# Allegro board newBoardCircle_squarechug_viadone.brd
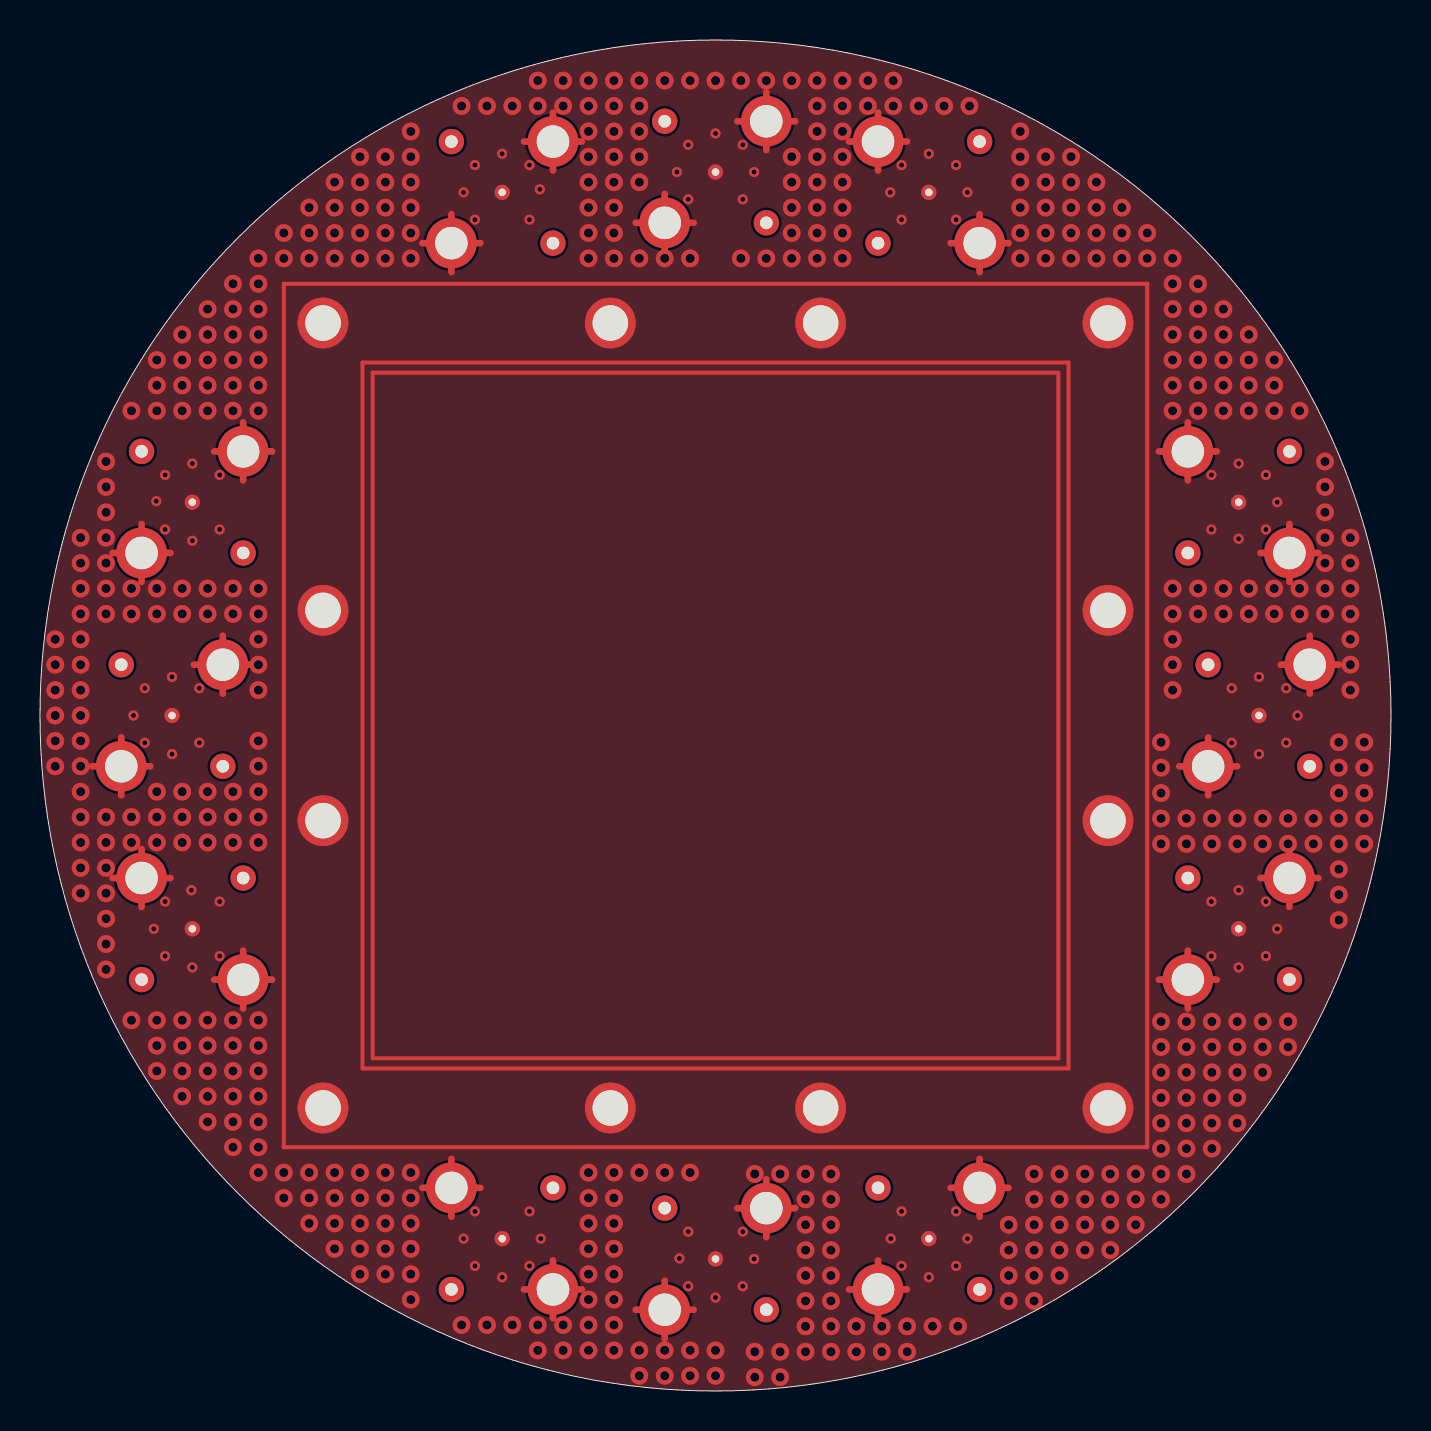
[diagram p0: board, top side]
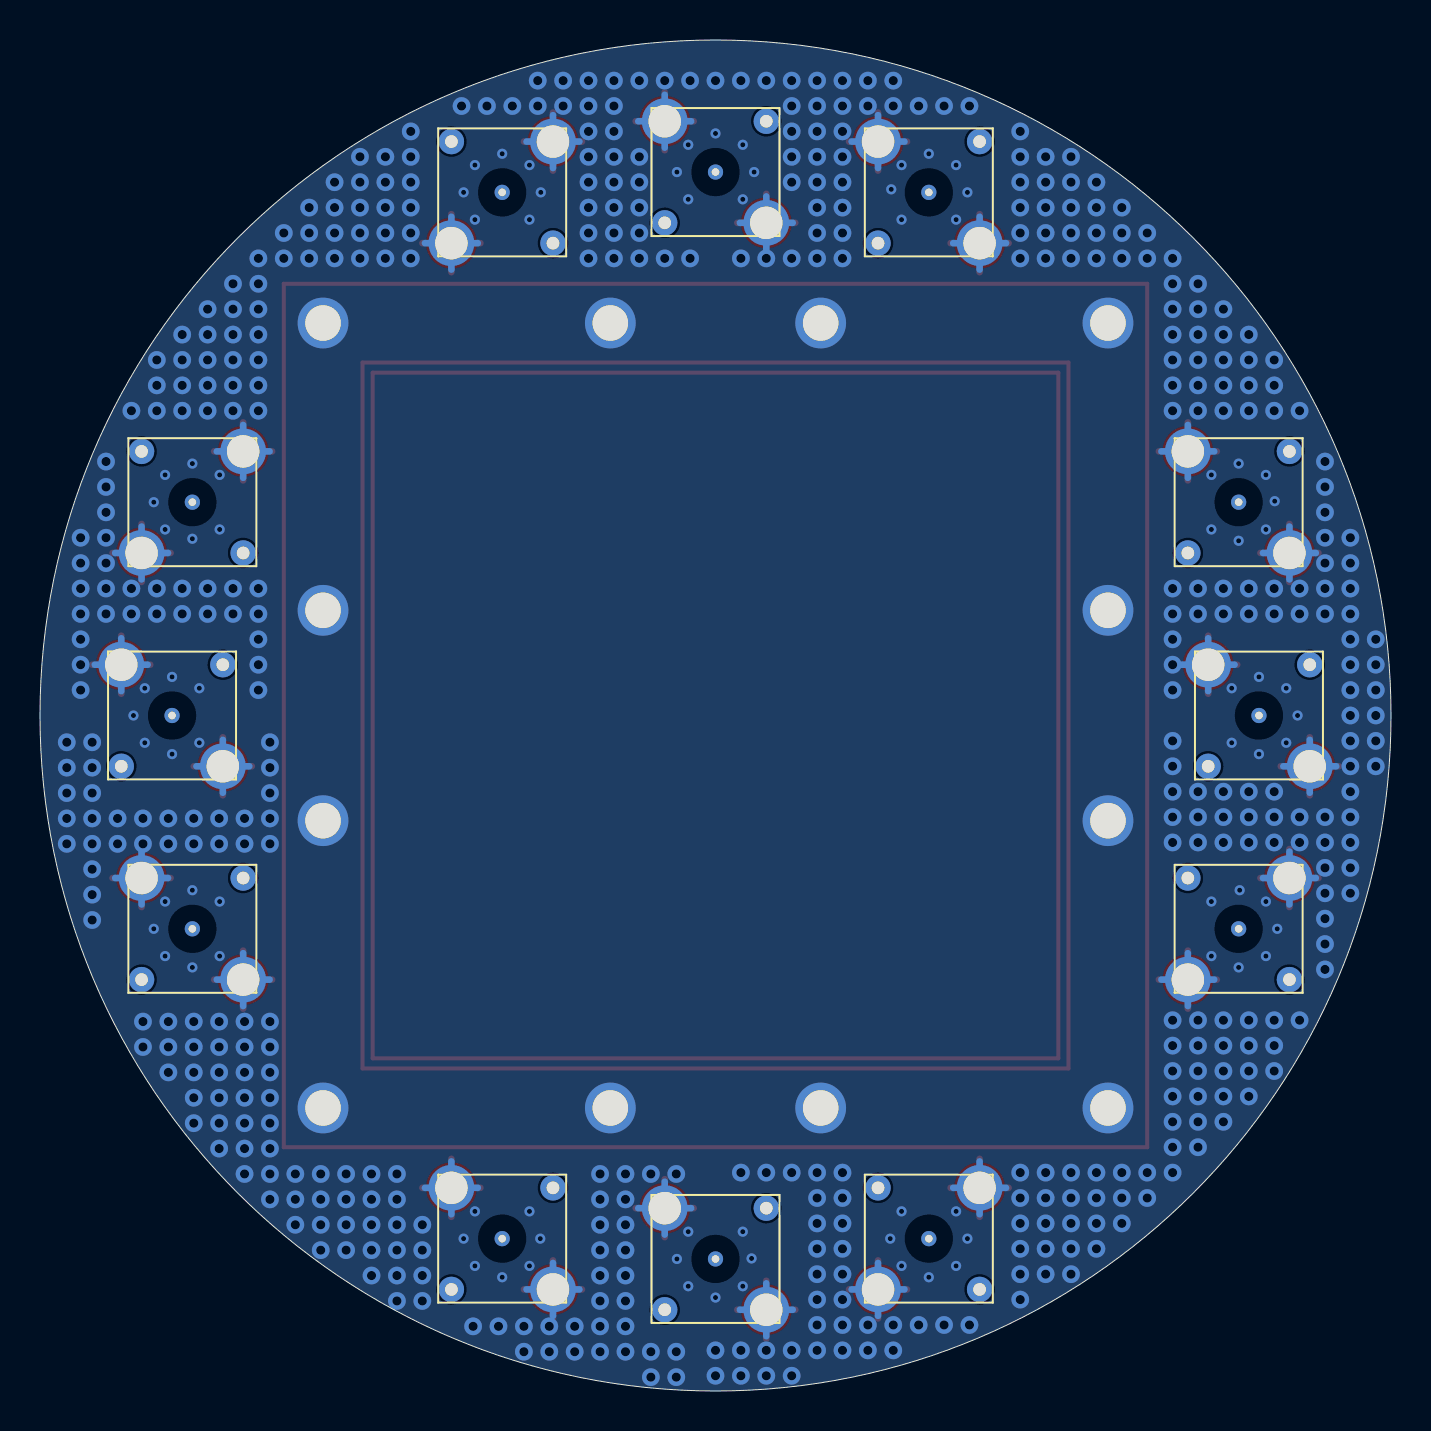
[diagram p1: board, bottom side, seen from below]

Outline 67.56 x 67.56 mm; copper layers: TOP, 02_GND, 03_SIG, BOTTOM. Coordinates in mm from the lower left corner of the outline.
Outline path: circle c33.78,33.78 r33.78

## Placement (name value [footprint] x y rotation side)
J1  -  [SSMA_BB]  60.96 33.78 180 bottom
J2  -  [SSMA_BB]  59.94 44.45 270 bottom
J3  -  [SSMA_BB]  44.45 59.94 270 bottom
J4  -  [SSMA_BB]  33.78 60.96 180 bottom
J5  -  [SSMA_BB]  23.11 59.94 180 bottom
J6  -  [SSMA_BB]  7.62 44.45 180 bottom
J7  -  [SSMA_BB]  6.6 33.78 180 bottom
J8  -  [SSMA_BB]  7.62 23.11 270 bottom
J9  -  [SSMA_BB]  23.11 7.62 270 bottom
J10  -  [SSMA_BB]  33.78 6.6 180 bottom
J11  -  [SSMA_BB]  44.45 7.62 180 bottom
J12  -  [SSMA_BB]  59.94 23.11 180 bottom
MTG1  -  [HOLE070P]  53.41 39.04 0 top
MTG2  -  [HOLE070P]  39.04 53.41 0 top
MTG3  -  [HOLE070P]  28.52 53.41 0 top
MTG4  -  [HOLE070P]  14.15 39.04 0 top
MTG5  -  [HOLE070P]  14.15 28.52 0 top
MTG6  -  [HOLE070P]  28.52 14.15 0 top
MTG7  -  [HOLE070P]  39.04 14.15 0 top
MTG8  -  [HOLE070P]  53.41 28.52 0 top
MTG9  -  [HOLE070P]  53.41 53.41 0 top
MTG10  -  [HOLE070P]  53.41 14.15 0 top
MTG11  -  [HOLE070P]  14.15 14.15 0 top
MTG12  -  [HOLE070P]  14.15 53.41 0 top

## Library data of the parts
J1-J12 = SSMA_BB
MTG1-MTG12 = HOLE070P

## Footprints (pads in the part's own frame, mm; a bottom-side part is the same pattern mirrored in y, then rotated)
HOLE070P
  round 2.54 hole 1.778: 1(0,0)
SSMA_BB
  round 1.27 hole 0.635: (-2.54,-2.54) (2.54,2.54)
  round 0.762 hole 0.381: 1(0,0)
  round 2.54 hole 1.626: 2(-2.54,2.54) 3(2.54,-2.54)

## Nets
GND: J1.2(TP-2) J1.3(TP-3) J2.2(TP-2) J2.3(TP-3) J3.2(TP-2) J3.3(TP-3) J4.2(TP-2) J4.3(TP-3) J5.2(TP-2) J5.3(TP-3) J6.2(TP-2) J6.3(TP-3) J7.2(TP-2) J7.3(TP-3) J8.2(TP-2) J8.3(TP-3) J9.2(TP-2) J9.3(TP-3) J10.2(TP-2) J10.3(TP-3) J11.2(TP-2) J11.3(TP-3) J12.2(TP-2) J12.3(TP-3) MTG1.1(TP-1) MTG2.1(TP-1) MTG3.1(TP-1) MTG4.1(TP-1) MTG5.1(TP-1) MTG6.1(TP-1) MTG7.1(TP-1) MTG8.1(TP-1) MTG9.1(TP-1) MTG10.1(TP-1) MTG11.1(TP-1) MTG12.1(TP-1)
MICROWAVE: J1.1(TP-1) J2.1(TP-1) J3.1(TP-1) J4.1(TP-1) J5.1(TP-1) J6.1(TP-1) J7.1(TP-1) J8.1(TP-1) J9.1(TP-1) J10.1(TP-1) J11.1(TP-1) J12.1(TP-1)

## Via types
v1: diameter 0.889, hole 0.457, TOP to BOTTOM, 469 vias
v2: diameter 0.508, hole 0.254, TOP to BOTTOM, 84 vias

## Routing (per net, layer and track width the routed paths; a pad name or vN(x,y) marks a point on that pad's centre or on a via; arc(x,y) is an arc through that point)
GND: length 392.7
  TOP w0.33: J6.2 11.61,46.99 ; J6.2 8.71,46.99 ; J6.2 10.16,45.54 ; J6.2 10.16,48.44 ; J5.3 22.02,57.4 ; J5.3 20.57,55.96 ; J5.3 20.57,58.85 ; J5.3 19.13,57.4 ; 36.32,62.05 J4.2 ; J4.2 34.87,63.5 ; J4.2 36.32,64.95 ; J4.2 37.77,63.5 ; J2.2 57.4,48.44 ; J2.2 55.96,46.99 ; J2.2 58.85,46.99 ; J2.2 57.4,45.54 ; 24.21,5.08 J9.3 ; J9.3 25.65,6.53 ; J9.3 27.1,5.08 ; J9.3 25.65,3.63 ; J3.3 46.99,58.85 ; J3.3 48.44,57.4 ; J3.3 45.54,57.4 ; J3.3 46.99,55.96 ; 46.99,8.71 J11.2 ; J11.2 45.54,10.16 ; J11.2 48.44,10.16 ; J11.2 46.99,11.61 ; 40.46,62.48 J3.2 ; J3.2 41.91,61.04 ; J3.2 41.91,63.93 ; J3.2 43.36,62.48 ; 34.87,9.14 J10.2 ; J10.2 36.32,10.59 ; J10.2 37.77,9.14 ; J10.2 36.32,7.7 ; J10.3 31.24,5.51 ; J10.3 29.79,4.06 ; J10.3 32.69,4.06 ; J10.3 31.24,2.62 ; J12.3 58.85,20.57 ; J12.3 55.96,20.57 ; J12.3 57.4,19.13 ; J12.3 57.4,22.02 ; 4.06,29.79 J7.3 ; J7.3 4.06,32.69 ; J7.3 2.62,31.24 ; J7.3 5.51,31.24 ; 58.42,29.79 J1.3 ; J1.3 56.97,31.24 ; J1.3 59.87,31.24 ; J1.3 58.42,32.69 ; 10.16,19.13 J8.3 ; J8.3 10.16,22.02 ; J8.3 8.71,20.57 ; J8.3 11.61,20.57 ; 62.48,24.21 J12.2 ; J12.2 62.48,27.1 ; J12.2 61.04,25.65 ; J12.2 63.93,25.65 ; 9.14,34.87 J7.2 ; J7.2 10.59,36.32 ; J7.2 7.7,36.32 ; J7.2 9.14,37.77 ; J1.2 63.5,37.77 ; J1.2 62.05,36.32 ; J1.2 63.5,34.87 ; J1.2 64.95,36.32 ; 25.65,61.04 J5.2 ; J5.2 27.1,62.48 ; J5.2 25.65,63.93 ; J5.2 24.21,62.48 ; 3.63,25.65 J8.2 ; J8.2 5.08,24.21 ; J8.2 5.08,27.1 ; J8.2 6.53,25.65 ; J4.3 31.24,59.87 ; J4.3 29.79,58.42 ; J4.3 32.69,58.42 ; J4.3 31.24,56.97 ; J2.3 63.93,41.91 ; J2.3 62.48,40.46 ; J2.3 62.48,43.36 ; J2.3 61.04,41.91 ; 20.57,8.71 J9.2 ; J9.2 20.57,11.61 ; J9.2 22.02,10.16 ; J9.2 19.13,10.16 ; J6.3 5.08,43.36 ; J6.3 3.63,41.91 ; J6.3 6.53,41.91 ; J6.3 5.08,40.46 ; 40.46,5.08 J11.3 ; J11.3 41.91,3.63 ; J11.3 43.36,5.08 ; J11.3 41.91,6.53
  03_SIG w0.33: 3.76,41.91 J6.3 ; J6.3 6.4,41.91 ; J6.3 5.08,40.59 ; J6.3 5.08,43.23 ; J3.2 43.23,62.48 ; J3.2 40.59,62.48 ; J3.2 41.91,61.16 ; J3.2 41.91,63.81 ; J8.3 10.16,21.9 ; J8.3 10.16,19.25 ; J8.3 11.48,20.57 ; J8.3 8.84,20.57 ; J9.3 26.98,5.08 ; J9.3 25.65,3.76 ; J9.3 25.65,6.4 ; J9.3 24.33,5.08 ; J7.3 5.39,31.24 ; J7.3 4.06,32.56 ; J7.3 2.74,31.24 ; J7.3 4.06,29.92 ; J6.2 11.48,46.99 ; J6.2 10.16,48.31 ; J6.2 8.84,46.99 ; J6.2 10.16,45.67 ; 9.14,35 J7.2 ; J7.2 9.14,37.64 ; J7.2 10.47,36.32 ; J7.2 7.82,36.32 ; J12.3 58.73,20.57 ; J12.3 56.08,20.57 ; J12.3 57.4,19.25 ; J12.3 57.4,21.9 ; 25.65,61.16 J5.2 ; J5.2 24.33,62.48 ; J5.2 26.98,62.48 ; J5.2 25.65,63.81 ; 62.48,40.59 J2.3 ; J2.3 63.81,41.91 ; J2.3 62.48,43.23 ; J2.3 61.16,41.91 ; J1.3 59.74,31.24 ; J1.3 58.42,32.56 ; J1.3 57.1,31.24 ; J1.3 58.42,29.92 ; 46.99,8.84 J11.2 ; J11.2 48.31,10.16 ; J11.2 46.99,11.48 ; J11.2 45.67,10.16 ; J12.2 62.48,26.98 ; J12.2 62.48,24.33 ; J12.2 61.16,25.65 ; J12.2 63.81,25.65 ; J10.2 36.32,10.47 ; J10.2 35,9.14 ; J10.2 37.64,9.14 ; J10.2 36.32,7.82 ; J5.3 21.9,57.4 ; J5.3 19.25,57.4 ; J5.3 20.57,56.08 ; J5.3 20.57,58.73 ; 29.92,58.42 J4.3 ; J4.3 32.56,58.42 ; J4.3 31.24,59.74 ; J4.3 31.24,57.1 ; 29.92,4.06 J10.3 ; J10.3 31.24,5.39 ; J10.3 31.24,2.74 ; J10.3 32.56,4.06 ; 41.91,3.76 J11.3 ; J11.3 41.91,6.4 ; J11.3 40.59,5.08 ; J11.3 43.23,5.08 ; J9.2 20.57,11.48 ; J9.2 19.25,10.16 ; J9.2 21.9,10.16 ; J9.2 20.57,8.84 ; J3.3 46.99,58.73 ; J3.3 45.67,57.4 ; J3.3 48.31,57.4 ; J3.3 46.99,56.08 ; J2.2 57.4,48.31 ; J2.2 58.73,46.99 ; J2.2 57.4,45.67 ; J2.2 56.08,46.99 ; J4.2 36.32,64.82 ; J4.2 37.64,63.5 ; J4.2 36.32,62.18 ; J4.2 35,63.5 ; J8.2 5.08,26.98 ; J8.2 5.08,24.33 ; J8.2 6.4,25.65 ; J8.2 3.76,25.65 ; J1.2 64.82,36.32 ; J1.2 63.5,35 ; J1.2 62.18,36.32 ; J1.2 63.5,37.64
  BOTTOM w0.33: J5.3 21.9,57.4 ; J5.3 20.57,58.73 ; J5.3 19.25,57.4 ; J5.3 20.57,56.08 ; J7.3 4.06,32.56 ; J7.3 5.39,31.24 ; J7.3 2.74,31.24 ; J7.3 4.06,29.92 ; 19.25,10.16 J9.2 ; J9.2 20.57,11.48 ; J9.2 21.9,10.16 ; J9.2 20.57,8.84 ; 56.08,46.99 J2.2 ; J2.2 58.73,46.99 ; J2.2 57.4,45.67 ; J2.2 57.4,48.31 ; 3.76,25.65 J8.2 ; J8.2 5.08,24.33 ; J8.2 5.08,26.98 ; J8.2 6.4,25.65 ; 31.24,57.1 J4.3 ; J4.3 29.92,58.42 ; J4.3 32.56,58.42 ; J4.3 31.24,59.74 ; 35,9.14 J10.2 ; J10.2 36.32,7.82 ; J10.2 37.64,9.14 ; J10.2 36.32,10.47 ; 40.59,5.08 J11.3 ; J11.3 41.91,6.4 ; J11.3 43.23,5.08 ; J11.3 41.91,3.76 ; J3.2 41.91,63.81 ; J3.2 41.91,61.16 ; J3.2 43.23,62.48 ; J3.2 40.59,62.48 ; 62.18,36.32 J1.2 ; J1.2 64.82,36.32 ; J1.2 63.5,35 ; J1.2 63.5,37.64 ; 61.16,25.65 J12.2 ; J12.2 62.48,24.33 ; J12.2 62.48,26.98 ; J12.2 63.81,25.65 ; 25.65,61.16 J5.2 ; J5.2 25.65,63.81 ; J5.2 24.33,62.48 ; J5.2 26.98,62.48 ; 5.08,40.59 J6.3 ; J6.3 5.08,43.23 ; J6.3 3.76,41.91 ; J6.3 6.4,41.91 ; 24.33,5.08 J9.3 ; J9.3 25.65,6.4 ; J9.3 25.65,3.76 ; J9.3 26.98,5.08 ; J4.2 37.64,63.5 ; J4.2 35,63.5 ; J4.2 36.32,62.18 ; J4.2 36.32,64.82 ; 31.24,2.74 J10.3 ; J10.3 32.56,4.06 ; J10.3 29.92,4.06 ; J10.3 31.24,5.39 ; J11.2 46.99,11.48 ; J11.2 48.31,10.16 ; J11.2 45.67,10.16 ; J11.2 46.99,8.84 ; 57.4,19.25 J12.3 ; J12.3 56.08,20.57 ; J12.3 57.4,21.9 ; J12.3 58.73,20.57 ; J1.3 58.42,32.56 ; J1.3 57.1,31.24 ; J1.3 59.74,31.24 ; J1.3 58.42,29.92 ; 10.16,19.25 J8.3 ; J8.3 8.84,20.57 ; J8.3 11.48,20.57 ; J8.3 10.16,21.9 ; J6.2 10.16,48.31 ; J6.2 8.84,46.99 ; J6.2 11.48,46.99 ; J6.2 10.16,45.67 ; J2.3 62.48,43.23 ; J2.3 62.48,40.59 ; J2.3 61.16,41.91 ; J2.3 63.81,41.91 ; J7.2 10.47,36.32 ; J7.2 7.82,36.32 ; J7.2 9.14,35 ; J7.2 9.14,37.64 ; J3.3 48.31,57.4 ; J3.3 46.99,56.08 ; J3.3 46.99,58.73 ; J3.3 45.67,57.4
  vias: v1(0.76,37.59) v1(0.76,36.32) v1(0.76,35.05) v1(0.76,33.78) v1(0.76,32.51) v1(0.76,31.24) v1(2.03,42.67) v1(2.03,41.4) v1(2.03,40.13) v1(2.03,38.86) v1(2.03,37.59) v1(2.03,36.32) v1(2.03,35.05) v1(2.03,33.78) v1(2.03,32.51) v1(2.03,31.24) v1(2.03,29.97) v1(2.03,28.7) v1(2.03,27.43) v1(2.03,26.16) v1(2.03,24.89) v1(3.3,46.48) v1(3.3,45.21) v1(3.3,43.94) v1(3.3,42.67) v1(3.3,41.4) v1(3.3,40.13) v1(3.3,38.86) v1(3.3,28.7) v1(3.3,27.43) v1(3.3,26.16) v1(3.3,24.89) v1(3.3,23.62) v1(3.3,22.35) v1(3.3,21.08) v1(4.57,49.02) v1(4.57,40.13) v1(4.57,38.86) v1(4.57,28.7) v1(4.57,27.43) v1(4.57,18.54) v1(5.84,51.56) v1(5.84,50.29) v1(5.84,49.02) v1(5.84,40.13) v1(5.84,38.86) v1(5.84,29.97) v1(5.84,28.7) v1(5.84,27.43) v1(5.84,18.54) v1(5.84,17.27) v1(5.84,16) v1(7.11,52.83) v1(7.11,51.56) v1(7.11,50.29) v1(7.11,49.02) v1(7.11,40.13) v1(7.11,38.86) v1(7.11,29.97) v1(7.11,28.7) v1(7.11,27.43) v1(7.11,18.54) v1(7.11,17.27) v1(7.11,16) v1(7.11,14.73) v1(8.38,54.1) v1(8.38,52.83) v1(8.38,51.56) v1(8.38,50.29) v1(8.38,49.02) v1(8.38,40.13) v1(8.38,38.86) v1(8.38,29.97) v1(8.38,28.7) v1(8.38,27.43) v1(8.38,18.54) v1(8.38,17.27) v1(8.38,16) v1(8.38,14.73) v1(8.38,13.46) v1(9.65,55.37) v1(9.65,54.1) v1(9.65,52.83) v1(9.65,51.56) v1(9.65,50.29) v1(9.65,49.02) v1(9.65,40.13) v1(9.65,38.86) v1(9.65,29.97) v1(9.65,28.7) v1(9.65,27.43) v1(9.65,18.54) v1(9.65,17.27) v1(9.65,16) v1(9.65,14.73) v1(9.65,13.46) v1(9.65,12.19) v1(10.92,56.64) v1(10.92,55.37) v1(10.92,54.1) v1(10.92,52.83) v1(10.92,51.56) v1(10.92,50.29) v1(10.92,49.02) v1(10.92,40.13) v1(10.92,38.86) v1(10.92,37.59) v1(10.92,36.32) v1(10.92,35.05) v1(10.92,32.51) v1(10.92,31.24) v1(10.92,29.97) v1(10.92,28.7) v1(10.92,27.43) v1(10.92,18.54) v1(10.92,17.27) v1(10.92,16) v1(10.92,14.73) v1(10.92,13.46) v1(10.92,12.19) v1(10.92,10.92) v1(12.19,57.91) v1(12.19,56.64) v1(12.19,10.92) v1(12.19,9.65) v1(13.46,59.18) v1(13.46,57.91) v1(13.46,56.64) v1(13.46,10.92) v1(13.46,9.65) v1(13.46,8.38) v1(14.73,60.45) v1(14.73,59.18) v1(14.73,57.91) v1(14.73,56.64) v1(14.73,10.92) v1(14.73,9.65) v1(14.73,8.38) v1(14.73,7.11) v1(16,61.72) v1(16,60.45) v1(16,59.18) v1(16,57.91) v1(16,56.64) v1(16,10.92) v1(16,9.65) v1(16,8.38) v1(16,7.11) v1(16,5.84) v1(17.27,61.72) v1(17.27,60.45) v1(17.27,59.18) v1(17.27,57.91) v1(17.27,56.64) v1(17.27,10.92) v1(17.27,9.65) v1(17.27,8.38) v1(17.27,7.11) v1(17.27,5.84) v1(18.54,62.99) v1(18.54,61.72) v1(18.54,60.45) v1(18.54,59.18) v1(18.54,57.91) v1(18.54,56.64) v1(18.54,10.92) v1(18.54,9.65) v1(18.54,8.38) v1(18.54,7.11) v1(18.54,5.84) v1(18.54,4.57) v1(21.08,64.26) v1(21.08,3.3) v1(22.35,64.26) v1(22.35,3.3) v1(23.62,64.26) v1(23.62,3.3) v1(24.89,65.53) v1(24.89,64.26) v1(24.89,3.3) v1(24.89,2.03) v1(26.16,65.53) v1(26.16,64.26) v1(26.16,3.3) v1(26.16,2.03) v1(27.43,65.53) v1(27.43,64.26) v1(27.43,62.99) v1(27.43,61.72) v1(27.43,60.45) v1(27.43,59.18) v1(27.43,57.91) v1(27.43,56.64) v1(27.43,10.92) v1(27.43,9.65) v1(27.43,8.38) v1(27.43,7.11) v1(27.43,5.84) v1(27.43,4.57) v1(27.43,3.3) v1(27.43,2.03) v1(28.7,65.53) v1(28.7,64.26) v1(28.7,62.99) v1(28.7,61.72) v1(28.7,60.45) v1(28.7,59.18) v1(28.7,57.91) v1(28.7,56.64) v1(28.7,10.92) v1(28.7,9.65) v1(28.7,8.38) v1(28.7,7.11) v1(28.7,5.84) v1(28.7,4.57) v1(28.7,3.3) v1(28.7,2.03) v1(29.97,65.53) v1(29.97,64.26) v1(29.97,62.99) v1(29.97,61.72) v1(29.97,60.45) v1(29.97,56.64) v1(29.97,10.92) v1(29.97,2.03) v1(29.97,0.76) v1(31.24,65.53) v1(31.24,56.64) v1(31.24,10.92) v1(31.24,2.03) v1(31.24,0.76) v1(32.51,65.53) v1(32.51,56.64) v1(32.51,10.92) v1(32.51,2.03) v1(32.51,0.76) v1(33.78,65.53) v1(33.78,2.03) v1(33.78,0.76) v1(35.05,65.53) v1(35.05,56.64) v1(35.74,10.85) v1(35.74,1.96) v1(35.74,0.69) v1(36.32,65.53) v1(36.32,56.64) v1(37.01,10.85) v1(37.01,1.96) v1(37.01,0.69) v1(37.59,65.53) v1(37.59,61.72) v1(37.59,60.45) v1(37.59,59.18) v1(37.59,57.91) v1(37.59,56.64) v1(38.28,10.85) v1(38.28,9.58) v1(38.28,8.31) v1(38.28,7.04) v1(38.28,5.77) v1(38.28,4.5) v1(38.28,3.23) v1(38.28,1.96) v1(38.86,65.53) v1(38.86,64.26) v1(38.86,62.99) v1(38.86,61.72) v1(38.86,60.45) v1(38.86,59.18) v1(38.86,57.91) v1(38.86,56.64) v1(39.55,10.85) v1(39.55,9.58) v1(39.55,8.31) v1(39.55,7.04) v1(39.55,5.77) v1(39.55,4.5) v1(39.55,3.23) v1(39.55,1.96) v1(40.13,65.53) v1(40.13,64.26) v1(40.13,62.99) v1(40.13,61.72) v1(40.13,60.45) v1(40.13,59.18) v1(40.13,57.91) v1(40.13,56.64) v1(40.82,3.23) v1(40.82,1.96) v1(41.4,65.53) v1(41.4,64.26) v1(42.09,3.23) v1(42.09,1.96) v1(42.67,65.53) v1(42.67,64.26) v1(43.36,3.23) v1(43.36,1.96) v1(43.94,64.26) v1(44.63,3.23) v1(45.21,64.26) v1(45.9,3.23) v1(46.48,64.26) v1(48.44,8.31) v1(48.44,7.04) v1(48.44,5.77) v1(48.44,4.5) v1(49.02,62.99) v1(49.02,61.72) v1(49.02,60.45) v1(49.02,59.18) v1(49.02,57.91) v1(49.02,56.64) v1(49.71,10.85) v1(49.71,9.58) v1(49.71,8.31) v1(49.71,7.04) v1(49.71,5.77) v1(49.71,4.5) v1(50.29,61.72) v1(50.29,60.45) v1(50.29,59.18) v1(50.29,57.91) v1(50.29,56.64) v1(50.98,10.85) v1(50.98,9.58) v1(50.98,8.31) v1(50.98,7.04) v1(50.98,5.77) v1(51.56,61.72) v1(51.56,60.45) v1(51.56,59.18) v1(51.56,57.91) v1(51.56,56.64) v1(52.25,10.85) v1(52.25,9.58) v1(52.25,8.31) v1(52.25,7.04) v1(52.83,60.45) v1(52.83,59.18) v1(52.83,57.91) v1(52.83,56.64) v1(53.52,10.85) v1(53.52,9.58) v1(53.52,8.31) v1(53.52,7.04) v1(54.1,59.18) v1(54.1,57.91) v1(54.1,56.64) v1(54.79,10.85) v1(54.79,9.58) v1(54.79,8.31) v1(55.37,57.91) v1(55.37,56.64) v1(56.06,32.44) v1(56.06,31.17) v1(56.06,29.9) v1(56.06,28.63) v1(56.06,27.36) v1(56.06,18.47) v1(56.06,17.2) v1(56.06,15.93) v1(56.06,14.66) v1(56.06,13.39) v1(56.06,12.12) v1(56.06,10.85) v1(56.06,9.58) v1(56.64,56.64) v1(56.64,55.37) v1(56.64,54.1) v1(56.64,52.83) v1(56.64,51.56) v1(56.64,50.29) v1(56.64,49.02) v1(56.64,40.13) v1(56.64,38.86) v1(56.64,37.59) v1(56.64,36.32) v1(56.64,35.05) v1(57.33,28.63) v1(57.33,27.36) v1(57.33,18.47) v1(57.33,17.2) v1(57.33,15.93) v1(57.33,14.66) v1(57.33,13.39) v1(57.33,12.12) v1(57.33,10.85) v1(57.91,55.37) v1(57.91,54.1) v1(57.91,52.83) v1(57.91,51.56) v1(57.91,50.29) v1(57.91,49.02) v1(57.91,40.13) v1(57.91,38.86) v1(58.6,28.63) v1(58.6,27.36) v1(58.6,18.47) v1(58.6,17.2) v1(58.6,15.93) v1(58.6,14.66) v1(58.6,13.39) v1(58.6,12.12) v1(59.18,54.1) v1(59.18,52.83) v1(59.18,51.56) v1(59.18,50.29) v1(59.18,49.02) v1(59.18,40.13) v1(59.18,38.86) v1(59.87,28.63) v1(59.87,27.36) v1(59.87,18.47) v1(59.87,17.2) v1(59.87,15.93) v1(59.87,14.66) v1(59.87,13.39) v1(60.45,52.83) v1(60.45,51.56) v1(60.45,50.29) v1(60.45,49.02) v1(60.45,40.13) v1(60.45,38.86) v1(61.14,28.63) v1(61.14,27.36) v1(61.14,18.47) v1(61.14,17.2) v1(61.14,15.93) v1(61.72,51.56) v1(61.72,50.29) v1(61.72,49.02) v1(61.72,40.13) v1(61.72,38.86) v1(62.41,28.63) v1(62.41,27.36) v1(62.41,18.47) v1(62.41,17.2) v1(62.99,49.02) v1(62.99,40.13) v1(62.99,38.86) v1(63.68,28.63) v1(63.68,27.36) v1(64.26,46.48) v1(64.26,45.21) v1(64.26,43.94) v1(64.26,42.67) v1(64.26,41.4) v1(64.26,40.13) v1(64.26,38.86) v1(64.95,32.44) v1(64.95,31.17) v1(64.95,29.9) v1(64.95,28.63) v1(64.95,27.36) v1(64.95,26.09) v1(64.95,24.82) v1(64.95,23.55) v1(65.53,42.67) v1(65.53,41.4) v1(65.53,40.13) v1(65.53,38.86) v1(65.53,37.59) v1(65.53,36.32) v1(65.53,35.05) v1(66.22,32.44) v1(66.22,31.17) v1(66.22,29.9) v1(66.22,28.63) v1(66.22,27.36) v2(4.67,33.78) v2(5.24,35.15) v2(5.24,32.42) v2(5.69,23.11) v2(5.82,44.5) v2(6.26,45.81) v2(6.26,43.09) v2(6.26,24.48) v2(6.26,21.75) v2(6.6,35.71) v2(6.6,31.85) v2(7.62,46.38) v2(7.62,42.52) v2(7.57,25.04) v2(7.62,21.18) v2(7.97,35.15) v2(7.97,32.42) v2(8.98,45.81) v2(8.98,43.09) v2(8.98,24.48) v2(8.98,21.75) v2(21.18,59.94) v2(21.18,7.62) v2(21.75,61.31) v2(21.75,58.58) v2(21.75,8.98) v2(21.75,6.26) v2(23.11,61.87) v2(23.11,5.69) v2(24.48,61.31) v2(24.48,58.58) v2(24.48,8.98) v2(24.48,6.26) v2(24.99,60.1) v2(25.04,7.62) v2(31.85,60.96) v2(31.98,6.63) v2(32.42,62.32) v2(32.42,59.6) v2(32.42,7.97) v2(32.42,5.24) v2(33.78,62.89) v2(33.78,4.67) v2(35.15,62.32) v2(35.15,59.6) v2(35.15,7.97) v2(35.15,5.24) v2(35.71,60.96) v2(35.71,6.6) v2(42.52,59.94) v2(42.54,7.62) v2(43.09,61.31) v2(43.09,58.58) v2(43.09,8.98) v2(43.09,6.26) v2(44.45,61.87) v2(44.45,5.69) v2(45.81,61.31) v2(45.81,58.58) v2(45.81,8.98) v2(45.81,6.26) v2(46.38,59.94) v2(46.38,7.62) v2(58.58,45.81) v2(58.58,43.09) v2(58.58,24.48) v2(58.58,21.75) v2(59.6,35.15) v2(59.6,32.42) v2(59.94,46.38) v2(59.94,42.62) v2(59.94,25.04) v2(59.94,21.18) v2(60.96,35.71) v2(60.96,31.85) v2(61.31,45.81) v2(61.31,43.09) v2(61.31,24.48) v2(61.31,21.75) v2(61.87,44.45) v2(61.87,23.11) v2(62.32,35.15) v2(62.32,32.42) v2(62.89,33.78)
MICROWAVE: length 318
  03_SIG w0.33: J7.1 J1.1 ; J5.1 J9.1 ; J3.1 J11.1 ; J4.1 J10.1 ; J6.1 J2.1 ; J8.1 J12.1

## Copper pours and planes (outline as drawn; the poured copper is in the pictures)
GND on TOP, BOTTOM, 02_GND, 03_SIG: 0,33.78 67.56,33.78
